# Altium PCB Probe.PcbDoc (part 1 of 2)
Units mm, origin at the board's own origin, x right, y up, seen from the top; angles counter-clockwise.
Board outline 70 x 20 mm, 4 copper layers (Top, IN1 (GND), IN2, Bottom Layer), stack 1.587 mm thick; 69 components, 36 nets, 193 pads, 326 vias.
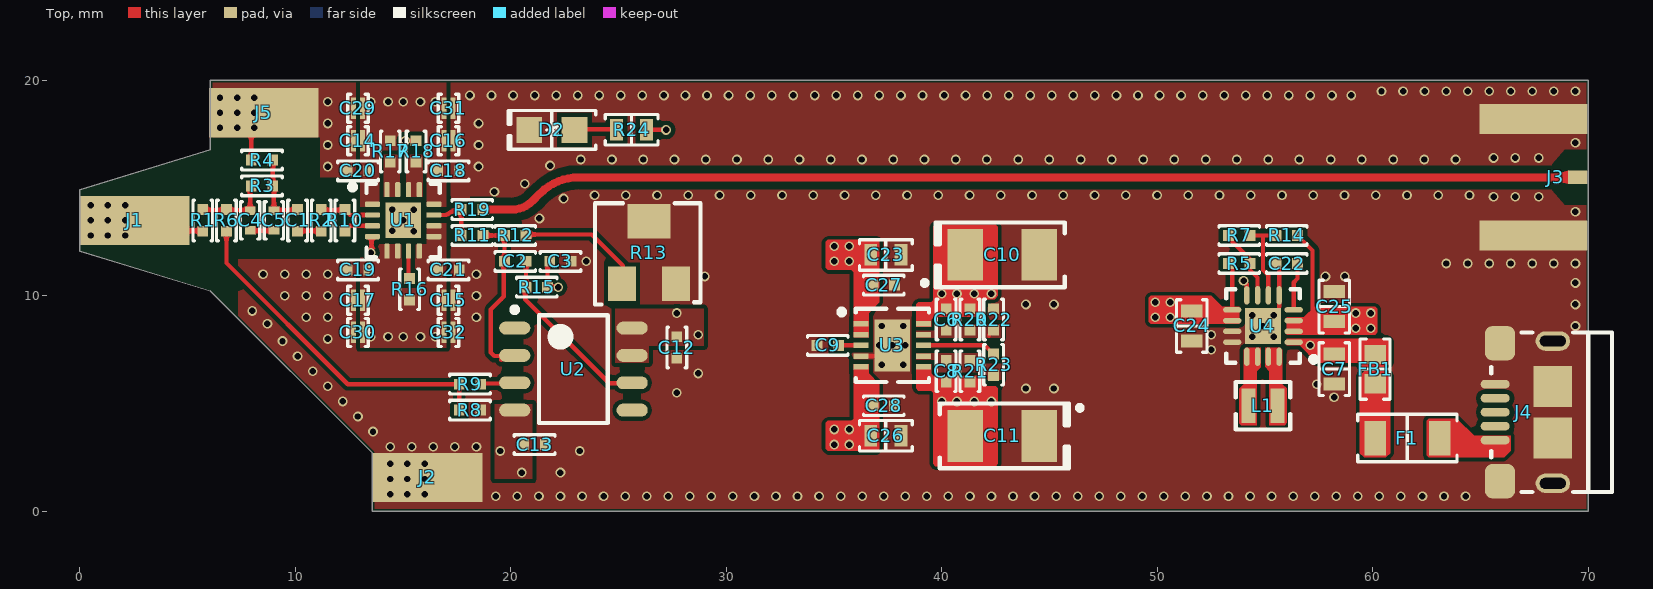
[diagram p0: Top view]
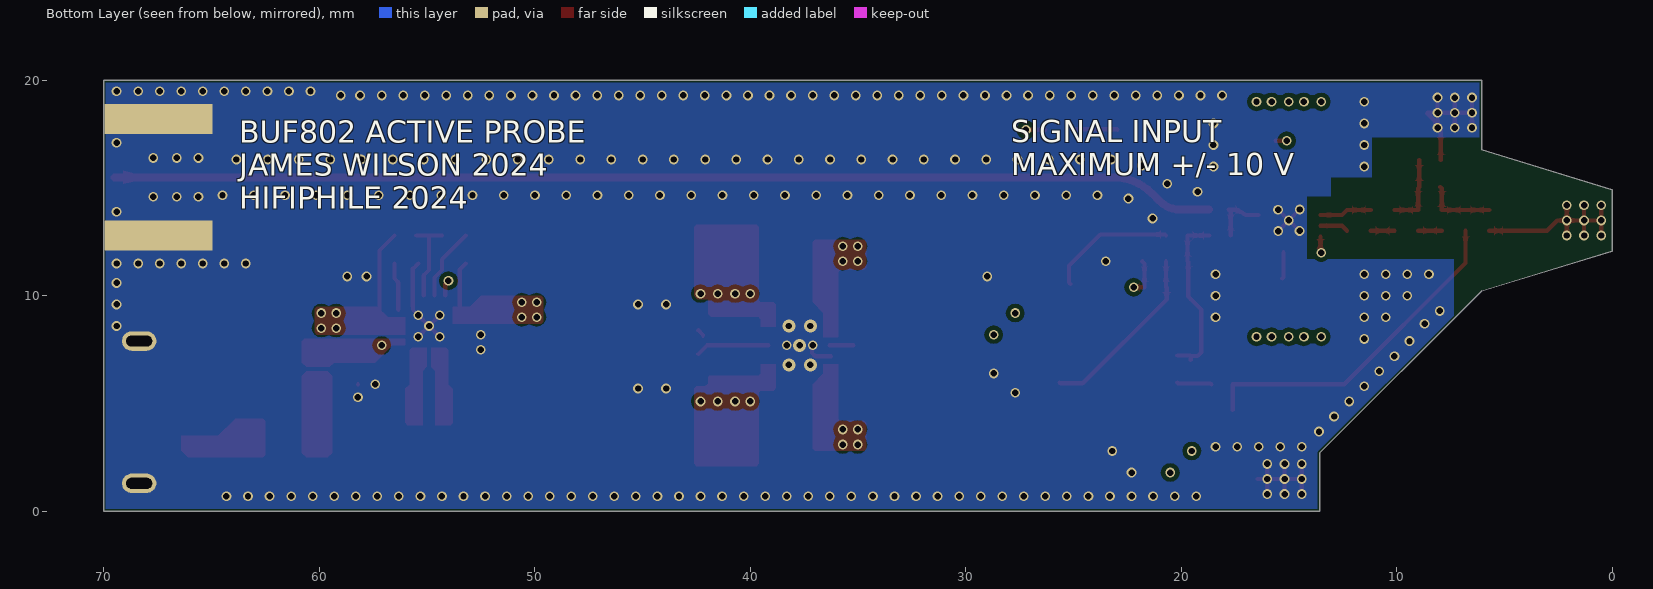
[diagram p1: Bottom Layer view, seen from below]
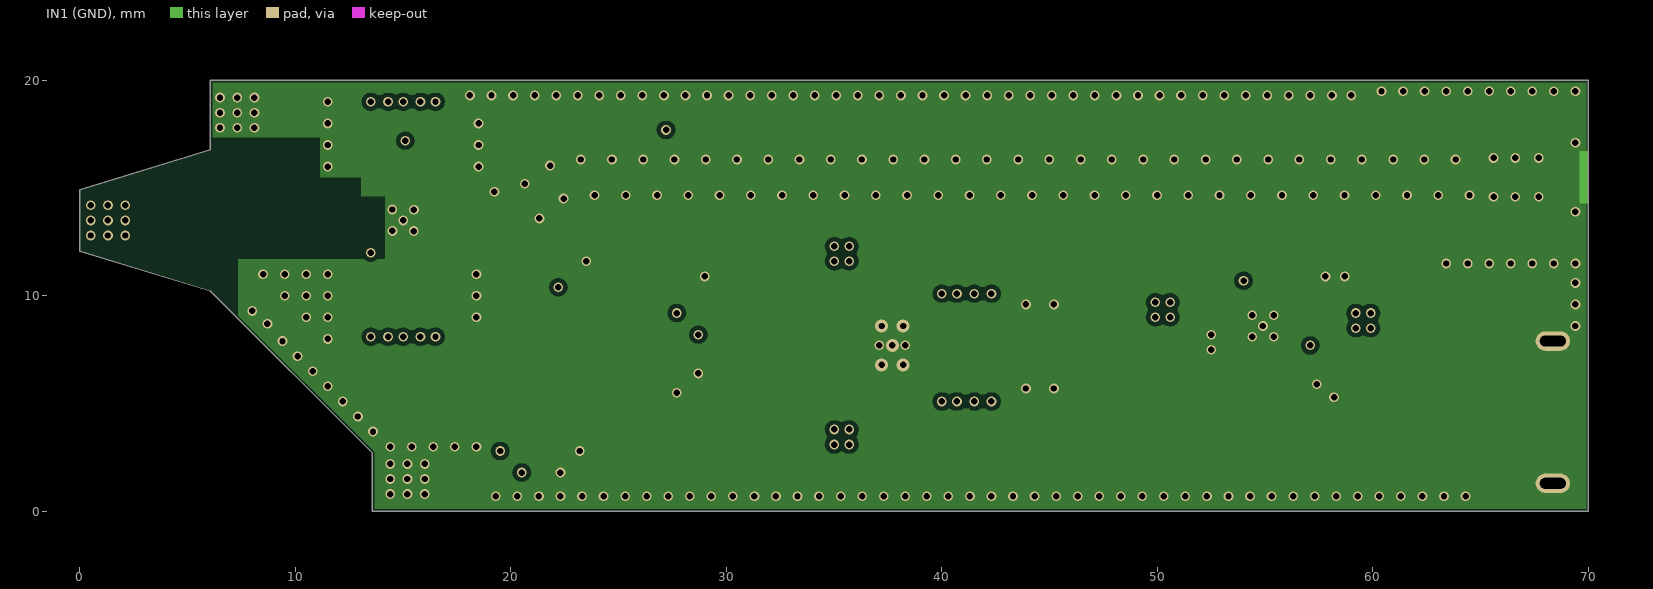
[diagram p2: IN1 (GND)]
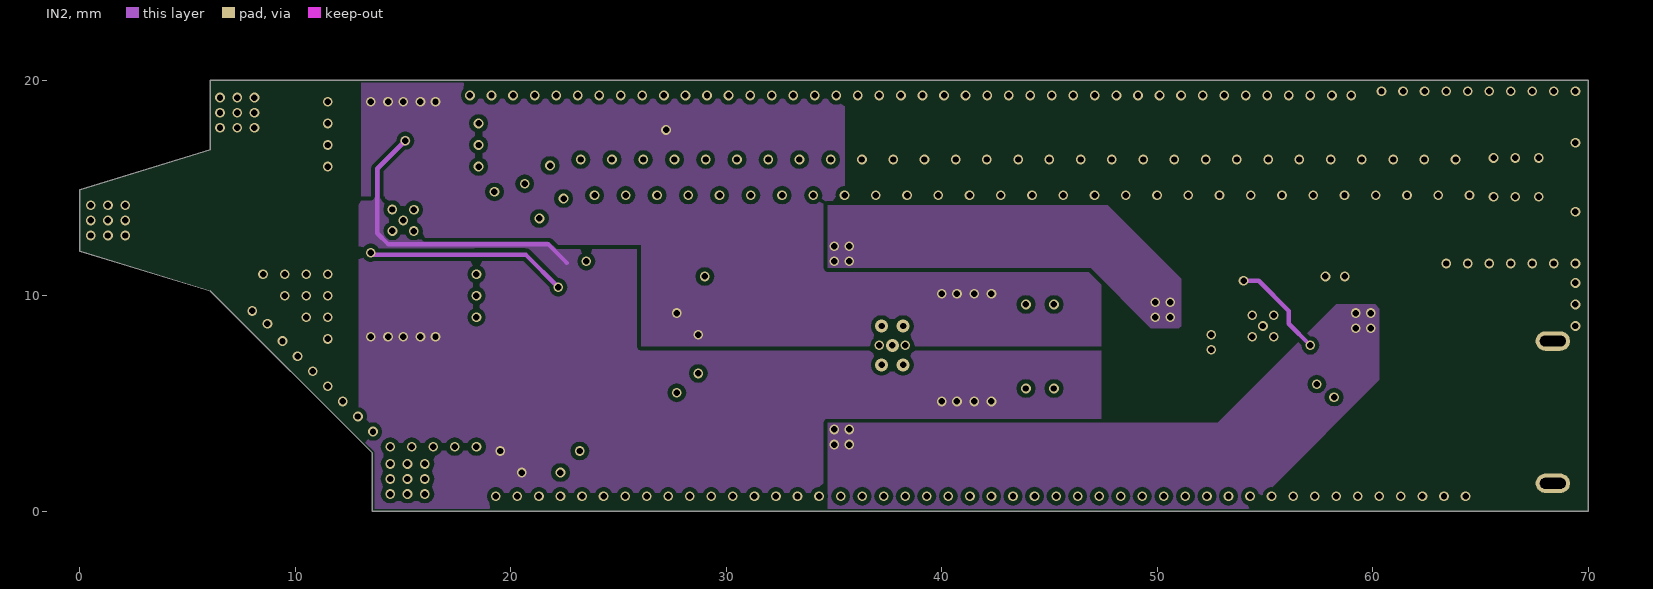
[diagram p3: IN2]

## Layer stack, top to bottom
Top Solder: solder mask 0.0152, Solder Resist, Dk 3.8
Top: signal copper 0.035
Dielectric 1: core 0.2104, FR-4, Dk 4.4
IN1 (GND): signal copper 0.0154
Dielectric 3: core 1.065, Dk 4.43
IN2: signal copper 0.0154
Dielectric 2: core 0.2104, FR-4, Dk 4.4
Bottom Layer: signal copper 0.035
Board Layer Stack Bottom Solder: solder mask 0.0152, Solder Resist, Dk 3.8

## Board outline
0,12.077 0,14.923 6.05,16.775 6.05,20 70,20 70,0 13.575,0 13.575,2.7 6.05,10.225

## Design rules (kind name [scope] priority, off if disabled: settings)
BoardOutlineClearance BoardOutlineClearance_outer [OnCopper and OnOutside] p1: gap=0.1 ignorepadtopadclearanceinfootprint=FALSE
BoardOutlineClearance BoardOutlineClearance_L3 [OnLayer('Signal/Power')] p2: gap=0.3 ignorepadtopadclearanceinfootprint=FALSE
BoardOutlineClearance BoardOutlineClearance_inner [OnCopper and not OnOutside] p3: gap=0.1 ignorepadtopadclearanceinfootprint=FALSE
Clearance Clearance_RF [All vs InNet('OUT')] p1: gap=0.37 ignorepadtopadclearanceinfootprint=FALSE
Clearance [All] p2: gap=0.152 ignorepadtopadclearanceinfootprint=FALSE except(0.199: Arc-Poly Track-Poly SMDPad-Poly THPad-Poly Via-Poly Fill-Poly Poly-Poly; 0.254: Arc-Hole Track-Hole SMDPad-Hole THPad-Hole Via-Hole Fill-Fill Fill-Region Fill-Hole Poly-Hole Region-Hole)
HoleSize [All] p1: absolutevalues=TRUE maxlimit=6.35 minlimit=0.254 maxpercent=80.000 minpercent=20.000
MinimumSolderMaskSliver [All] p1: minsoldermaskwidth=0.102
PlaneClearance [All] p1: clearance=0.3
PlaneConnect [All] p1: planeconnectstyle=Direct reliefexpansion=0.508 reliefentries=4 reliefconductorwidth=0.254 reliefairgap=0.254
PolygonConnect PolygonConnect_Relief [InComponentClass('Power plane relief') vs InNet('GND') OR InNet('VEE') OR InNet('VCC')] p1: connectstyle=Relief reliefconductorwidth=0.254 reliefentries=4 polygonreliefangle="90 Angle" airgapwidth=0.2
PolygonConnect [All] p2: connectstyle=Direct reliefconductorwidth=0.254 reliefentries=4 polygonreliefangle="90 Angle" airgapwidth=0.254
RoutingVias [All] p1: holewidth=0.3 width=0.45 viastyle="Through Hole" minholewidth=0.3 minwidth=0.45 maxholewidth=0.6 maxwidth=1.5
SilkToSolderMaskClearance [IsPad] p1: minsilkscreentomaskgap=0.127 clearancetoexposedcopper=TRUE
SolderMaskExpansion [All] p1: expansion=0.051 istentingtop=FALSE
Width "Schematic Width Constraint" [InNet('OUT')] p1: maxlimit=0.37 minlimit=0.17 preferedwidth=0.37 toplayer_minwidth=0.37 bottomlayer_minwidth=0.37 impedanceprofiledriven=TRUE impedanceprofileid={2937EA07-7A3F-48D3-879A-FAEFCB2B4967} impedanceprofilevalue=50.000000 minimp=50.000000 maximp=50.000000 favimp=50.000000
Width Width_RF [All] p2: maxlimit=5.08 minlimit=0.102 preferedwidth=0.254
Width [All] p3: maxlimit=5.08 minlimit=0.102 preferedwidth=0.254
25 further rules are at their usual default settings.

## Classes and differential pairs
net class Power: GND V+ V- VCC VEE
component class Power: C6 C7 C8 C9 C10 C11 C12 C13 C14 C15 C16 C17 C18 C19 C20 C21 C22 C23 C24 C25 C26 C27 C28 C29 C30 C31 C32 D2 F1 FB1 J4 L1 R5 R7 R14 R20 R21 R22 R23 R24 U3 U4
component class Probe: C1 C2 C3 C4 C5 J1 J2 J3 J5 R1 R2 R3 R4 R6 R8 R9 R10 R11 R12 R13 R15 R16 R17 R18 R19 U1 U2

## Components (designator, comment, footprint, x,y, rotation, side; value= is the part's Value field where it differs from the comment)
C1 "330pF" "CAP 0402/1005" 10.1,13.5 r270 top
C2 "47pF" "CAP 0402/1005" 20.2,11.6 r0 top
C3 "100pF" "CAP 0402/1005" 22.3,11.6 r0 top
C4 "1.1pF" "CAP 0402/1005 RF" 7.9,13.5 r270 top
C5 "1.3pF" "CAP 0402/1005 RF" 9,13.5 r90 top
C6 "10nF" "CAP 0402/1005" 40.2,8.9 r90 top
C7 "10uF" "CAP 0603/1608" 58.2,6.6 r90 top
C8 "10nF" "CAP 0402/1005" 40.2,6.5 r270 top
C9 "10nF" "CAP 0402/1005" 34.7,7.7 r180 top
C10 "22uF" "CAP TAN 3528 - 2.1MM" 42.8,11.9 r0 top
C11 "22uF" "CAP TAN 3528 - 2.1MM" 42.8,3.5 r180 top
C12 "100nF" "CAP 0402/1005" 27.7,7.6 r270 top
C13 "100nF" "CAP 0402/1005" 21.1,3.1 r180 top
C14 "100nF" "CAP 0204/0510" 12.9,17.2 r180 top
C15 "100nF" "CAP 0204/0510" 17.1,9.8 r180 top
C16 "100nF" "CAP 0204/0510" 17.1,17.2 r0 top
C17 "100nF" "CAP 0204/0510" 12.9,9.8 r0 top
C18 "10nF" "CAP 0402/1005" 17.1,15.8 r0 top
C19 "10nF" "CAP 0402/1005" 12.9,11.2 r0 top
C20 "10nF" "CAP 0402/1005" 12.9,15.8 r180 top
C21 "10nF" "CAP 0402/1005" 17.1,11.2 r180 top
C22 "100nF" "CAP 0402/1005" 56,11.5 r180 top
C23 "10uF" "CAP 0603/1608" 37.4,11.9 r0 top
C24 "10uF" "CAP 0603/1608" 51.6,8.6 r270 top
C25 "10uF" "CAP 0603/1608" 58.2,9.5 r90 top
C26 "10uF" "CAP 0603/1608" 37.4,3.5 r180 top
C27 "100nF" "CAP 0402/1005" 37.3,10.5 r0 top
C28 "100nF" "CAP 0402/1005" 37.3,4.9 r180 top
C29 "100nF" "CAP 0204/0510" 12.9,18.7 r180 top
C30 "100nF" "CAP 0204/0510" 12.9,8.3 r0 top
C31 "100nF" "CAP 0204/0510" 17.1,18.7 r0 top
C32 "100nF" "CAP 0204/0510" 17.1,8.3 r180 top
D2 "Green" "LED 0805/2012 GREEN" 21.9,17.7 r180 top
F1 "500mA" "PPTC 1206/3216" 61.6,3.4 r180 top
FB1 "470 Ohms @ 100MHz" "FER 0603/1608" 60.1,6.6 r90 top
J1 "0339-0-15-01-15-27-10-0" "MILL-MAX 0339"#1 0,13.5 r0 top
J2 "0339-0-15-01-15-27-10-0" "MILL-MAX 0339"#2 13.6,1.5 r0 top
J3 "CONN SMA JACK EDGE MNT" 60312202114513 75.5,15.5 r90 top
J4 "Micro USB" "FCI USB 10118193-0001LF" 68.3,4.6 r270 top
J5 "0339-0-15-01-15-27-10-0" "MILL-MAX 0339"#1 6,18.5 r0 top
L1 "2.2uH" "TDK VLS201612CX" 54.9,4.9 r180 top
R1 "100" "RES 0402/1005" 5.7,13.5 r90 top
R2 "0" "RES 0402/1005" 11.2,13.5 r90 top
R3 "1.6M" "RES 0402/1005" 8.45,15.1 r0 top
R4 "422K" "RES 0402/1005" 8.45,16.3 r180 top
R5 "453K" "RES 0402/1005" 53.8,11.5 r180 top
R6 "1.91M" "RES 0402/1005" 6.8,13.5 r270 top
R7 "120K" "RES 0402/1005" 53.8,12.8 r180 top
R8 "66.5k" "RES 0402/1005" 18.1,4.7 r0 top value=66.5K
R9 "68" "RES 0402/1005" 18.1,5.9 r0 top
R10 "10M" "RES 0402/1005" 12.3,13.5 r270 top
R11 "51K" "RES 0402/1005" 18.2,12.8 r180 top
R12 "10K" "RES 0402/1005" 20.2,12.8 r0 top
R13 "1k" "BOURNS 3224W" 26.4,12 r270 top value=1K
R14 "576K" "RES 0402/1005" 56,12.8 r180 top
R15 "5.6K" "RES 0402/1005" 21.2,10.4 r180 top
R16 "17.8k" "RES 0402/1005" 15.3,10.3 r270 top value=17.8K
R17 "1K" "RES 0402/1005" 14.4,16.7 r90 top
R18 "1K" "RES 0402/1005" 15.6,16.7 r90 top
R19 "49.9" "RES 0402/1005" 18.2,14 r0 top
R20 "36.5K" "RES 0402/1005" 41.3,8.9 r270 top
R21 "46.4K" "RES 0402/1005" 41.3,6.5 r270 top
R22 "10K" "RES 0402/1005" 42.4,8.9 r90 top
R23 "10K" "RES 0402/1005" 42.4,6.8 r90 top
R24 "10K" "RES 0603/1608" 25.6,17.7 r180 top
U1 "BUF802IRGTR" QFN50P305X305X100_HS-17N#1 15,13.5 r0 top
U2 "OPA140AIDR" "TI SOIC-8 D" 22.9,6.6 r0 top
U3 "TPS7A3901DCST" DFN50P300X300X80_HS-11N 37.7,7.7 r0 top
U4 "TPS65135RTER" QFN50P305X305X100_HS-17N#2 54.9,8.6 r180 top

## Footprints (in the part's own frame and the unit in brackets; to place one, negate y for a bottom-side part, rotate by r counter-clockwise, add the part's x,y. Pads: shape width x height; smd on the part's side, far side on the other; paste and mask are expansions set on the pad)
60312202114513 [mm] "SMA PCB End Launch Jack Flat Tab  6.35SQ Flange for 1.6mm PCB"
  rect 0.61x0.9 smd: 1(0,6)
  rect 1.4x5 smd: 2(-2.7,8.05) 2(2.7,8.05)
  rect 1.4x5 smd far side: 2(-2.7,8.05) 2(2.7,8.05)
  body extent -3.17,-3.95 3.17,10.25, height 3.34
"BOURNS 3224W" [mm] "3224 - 4 mm SMD Trimpot Trimming Potentiometer"
  rect 1.6x1.3 smd paste+0 mask+0: 1(1.45,-1.25) 3(1.45,1.25)
  rect 1.6x2 smd paste+0 mask+0: 2(-1.45,0)
  silkscreen extent -2.3,-2.5 2.4,2.4, body extent -1.98,-2.41 1.98,2.41, height 5.29
"CAP 0204/0510" [mm] "Chip Capacitor, 2-Leads, Body 0.52x1.0mm, IPC Medium Density"
  rect 0.22x1 smd paste+0 mask+0.02: 1(-0.21,0) 2(0.21,0)
  silkscreen extent -0.47,-0.65 0.47,0.65, body extent -0.26,-0.5 0.26,0.5, height 0.35
"CAP 0402/1005" [mm] "Chip Capacitor, 2-Leads, Body 1.02x0.51mm, IPC Medium Density"
  rect 0.5x0.5 smd: 1(-0.5,0) 2(0.5,0)
  silkscreen extent -0.94,-0.46 0.94,0.46, body extent -0.5,-0.26 0.5,0.26, height 0.52
"CAP 0402/1005 RF" [mm] "Chip Capacitor, 2-Leads, Body 1.02x0.51mm, IPC High Density"
  rect 0.4x0.5 smd: 1(-0.45,0) 2(0.45,0)
  silkscreen extent -0.87,-0.45 0.86,0.45, body extent -0.5,-0.26 0.5,0.26, height 0.52
"CAP 0603/1608" [mm] "Chip Capacitor, 2-Leads, Body 1.60x0.80mm, IPC Medium Density"
  rect 0.6x1 smd: 1(-0.7,0) 2(0.7,0)
  silkscreen extent -1.22,-0.71 1.22,0.7, body extent -0.8,-0.41 0.8,0.41, height 0.82
"CAP TAN 3528 - 2.1MM" [mm] "Molded Capacitor, 2-Leads, Body 3.50x2.80mm, IPC Medium Density"
  rect 1.65x2.4 smd: 1(-1.725,0) 2(1.725,0)
  silkscreen extent -3.7,-1.5 2.9,1.5, body extent -1.75,-1.4 1.75,1.4, height 1.91
DFN50P300X300X80_HS-11N [mm] "DFN, 10-Leads, Body 3.00x3.00mm, Pitch 0.50mm, Thermal Pad 1.65x2.40mm, IPC Medium Density"
  rect 0.7x0.25 smd: 1(-1.45,1) 2(-1.45,0.5) 3(-1.45,0) 4(-1.45,-0.5) 5(-1.45,-1) 6(1.45,-1) 7(1.45,-0.5) 8(1.45,0) 9(1.45,0.5) 10(1.45,1)
  rect 1.65x2.4 smd paste-2: 11(0,0)
  silkscreen extent -2.47,-1.7 1.7,1.7, body extent -1.6,-1.55 1.6,1.55, height 0.8
"FCI USB 10118193-0001LF" [mm] "USB 2.0 Type B Micro"
  oval 0.4x1.35 smd: 1(1.3,-2.625) 2(0.65,-2.625) 3(0,-2.625) 4(-0.65,-2.625) 5(-1.3,-2.625)
  oval 0.9x1.6 hole 0.5 slot 1.2 at 90 deg: S(-3.3,0.05) S(3.3,0.05)
  rrect50% 1.6x1.4 smd: S(-3.2,-2.4) S(3.2,-2.4)
  rect 1.9x1.8 smd: S(-1.2,0.05) S(1.2,0.05)
  silkscreen extent -3.7,-2.8 3.7,2.8, body extent -3.93,-2.9 3.93,2.76, height 2.78
"FER 0603/1608" [mm] "Chip Ferrite, 2-Leads, Body 1.60x0.80mm, IPC Medium Density"
  rect 0.9x1 smd: 1(-0.675,0) 2(0.675,0)
  silkscreen extent -1.4,-0.7 1.4,0.7, body extent -0.8,-0.41 0.8,0.41, height 0.82
"LED 0805/2012 GREEN" [mm] "Chip Diode, 2-Leads, Body 2.00x1.25mm, IPC Medium Density"
  rect 1.2x1.2 smd: 1(-1.05,0) 2(1.05,0)
  silkscreen extent -2.03,-0.9 2.03,0.9, body extent -1,-0.62 1,0.63, height 0.9
"MILL-MAX 0339"#1 [mil] "MILL-MAX 0339"
  rect 200x90 smd paste-1000: 1(100,0)
  body extent -15,-34 175,34, height 61
"MILL-MAX 0339"#2 [mil] "MILL-MAX 0339"
  rect 200x90 smd paste-1000: 1(100,2.91)
  body extent -15,-34 175,34, height 61
"PPTC 1206/3216" [mm] "PPTC 2-Leads, Body 3.2x1.6mm, IPC Medium Density"
  rect 1x1.6 smd: 1(-1.5,0) 2(1.5,0)
  silkscreen extent -2.3,-1.1 2.3,1.1, body extent -1.6,-0.83 1.6,0.83, height 0.56
QFN50P305X305X100_HS-17N#1 [mm] "QFN, 16-Leads, Body 3.05x3.05mm, Pitch 0.50mm, Thermal Pad 1.65x1.65mm, IPC Medium Density"
  rrect50% 0.7x0.25 smd: 1(-1.425,0.75) 2(-1.425,0.25) 3(-1.425,-0.25) 4(-1.425,-0.75) 9(1.425,-0.75) 10(1.425,-0.25) 11(1.425,0.25) 12(1.425,0.75)
  rrect50% 0.25x0.7 smd: 5(-0.75,-1.425) 6(-0.25,-1.425) 7(0.25,-1.425) 8(0.75,-1.425) 13(0.75,1.425) 14(0.25,1.425) 15(-0.25,1.425) 16(-0.75,1.425)
  rect 1.65x1.65 smd paste-0.1: 17(0,0)
  silkscreen extent -2.47,-1.7 1.7,1.7, body extent -1.56,-1.56 1.56,1.56, height 1
QFN50P305X305X100_HS-17N#2 [mm] "QFN, 16-Leads, Body 3.05x3.05mm, Pitch 0.50mm, Thermal Pad 1.65x1.65mm, IPC Medium Density"
  oval 0.85x0.25 smd: 1(-1.425,0.75) 2(-1.425,0.25) 3(-1.425,-0.25) 4(-1.425,-0.75) 9(1.425,-0.75) 10(1.425,-0.25) 11(1.425,0.25) 12(1.425,0.75)
  oval 0.25x0.85 smd: 5(-0.75,-1.425) 6(-0.25,-1.425) 7(0.25,-1.425) 8(0.75,-1.425) 13(0.75,1.425) 14(0.25,1.425) 15(-0.25,1.425) 16(-0.75,1.425)
  rect 1.65x1.65 smd paste-0.1: 17(0,0)
  silkscreen extent -2.48,-1.7 1.7,1.7, body extent -1.56,-1.56 1.56,1.56, height 1
"RES 0402/1005" [mm] "Chip Resistor, 2-Leads, Body 1.0x0.5mm, IPC Medium Density"
  rect 0.5x0.5 smd: 1(-0.5,0) 2(0.5,0)
  silkscreen extent -0.94,-0.46 0.94,0.46, body extent -0.5,-0.25 0.5,0.25, height 0.35
"RES 0603/1608" [mm] "Chip Resistor, 2-Leads, Body 1.60x0.80mm, IPC Medium Density"
  rect 0.6x1 smd: 1(-0.7,0) 2(0.7,0)
  silkscreen extent -1.22,-0.71 1.22,0.7, body extent -0.8,-0.4 0.8,0.4, height 0.45
"TDK VLS201612CX" [mm] "Inductor, 2-Leads, Body 2.00x1.60mm, IPC Medium Density"
  rect 0.65x1.6 smd: 1(-0.675,0) 2(0.675,0)
  silkscreen extent -1.27,-1.1 1.27,1.1, body extent -1,-0.8 1,0.8, height 1.2
"TI SOIC-8 D" [mm] "SOIC, 8-Leads, Body 4.90x3.90mm, Pitch 1.27mm, IPC Medium Density"
  oval 1.45x0.6 smd: 1(-2.725,1.905) 2(-2.725,0.635) 3(-2.725,-0.635) 4(-2.725,-1.905) 5(2.725,-1.905) 6(2.725,-0.635) 7(2.725,0.635) 8(2.725,1.905)
  silkscreen extent -2.85,-2.5 1.6,2.88, body extent -3,-2.5 3,2.5, height 1.75

## Part data
C1: library part CM0293, "CAP CER 330PF 50V NP0 0402", Device Package="0402 (1005 Metric)", Manufacturer=Murata, Part Number=GRM1555C1H331JA01D, Supplier Part Number 1=490-1295-2-ND, TemperatureCoefficient="C0G, NP0", TemperatureRange="-55C ~ 125C", Tolerance=5%, Voltage=50V, ComponentLink1Description=Datasheet, ComponentLink1URL=http://www.murata.com/~/media/webrenewal/support/library/catalog/products/capacitor/mlcc/c02e.ashx, ComponentLink2Description="Digi-Key listing", ComponentLink2URL=http://digikey.com/product-detail/en/GRM1555C1H331JA01D/490-1295-2-ND/587206, PartId=CM0293, Price=0.009, Supplier 1=Digi-Key, Type=-
C2: library part CM0224, "CAP CER 47PF 50V NP0 0402", Device Package="0402 (1005 Metric)", Manufacturer=Murata, Part Number=GRM1555C1H470FA01D, Supplier Part Number 1=490-6241-2-ND, TemperatureCoefficient="C0G, NP0", TemperatureRange="-55C ~ 125C", Tolerance=1%, Voltage=50V, ComponentLink1Description=Datasheet, ComponentLink1URL=http://www.murata.com/~/media/webrenewal/support/library/catalog/products/capacitor/mlcc/c02e.ashx, ComponentLink2Description="Digi-Key listing", ComponentLink2URL=http://digikey.com/product-detail/en/GRM1555C1H470FA01D/490-6241-2-ND/3693991, PartId=CM0224, Price=0.0133, Supplier 1=Digi-Key, Type=-
C3: library part CM0248, "CAP CER 100PF 50V NP0 0402", Device Package="0402 (1005 Metric)", Manufacturer=Murata, Part Number=GRM1555C1H101FA01D, Supplier Part Number 1=490-8180-2-ND, TemperatureCoefficient="C0G, NP0", TemperatureRange="-55C ~ 125C", Tolerance=1%, Voltage=50V, ComponentLink1Description=Datasheet, ComponentLink1URL=http://www.murata.com/~/media/webrenewal/support/library/catalog/products/capacitor/mlcc/c02e.pdf, ComponentLink2Description="Digi-Key Listing", ComponentLink2URL=https://www.digikey.com/product-detail/en/murata-electronics-north-america/GRM1555C1H101FA01D/490-8180-2-ND/3693919, PartId=CM0248, Price=0.0092, Supplier 1=Digi-Key
C4: library part CR1657, "CAP CER 1.1PF +-0.05PF 50V NP0 0201", Device Package="0402 (1005 Metric)", Manufacturer=Murata, Part Number=GJM1555C1H1R1WB01D, Supplier Part Number 1=81-GJM1555C1H1R1WB01D, TemperatureCoefficient="C0G, NP0", TemperatureRange="-55C ~ 125C", Tolerance=0.05pF, Voltage=50V, ComponentLink1Description=Datasheet, ComponentLink1URL=https://www.murata.com/en-eu/products/capacitor/ceramiccapacitor/overview/lineup/smd/gjm, PartId=CR1657, Price=0.02, Supplier 1=Mouser, Type="High Q, Low Loss"
C5: library part CR1663, "CAP CER 1.3PF +-0.05PF 50V NP0 0201", Device Package="0402 (1005 Metric)", Manufacturer=Murata, Part Number=GJM1555C1H1R3WB01D, Supplier Part Number 1=81-GJM1555C1H1R3WB01D, TemperatureCoefficient="C0G, NP0", TemperatureRange="-55C ~ 125C", Tolerance=0.05pF, Voltage=50V, ComponentLink1Description=Datasheet, ComponentLink1URL=https://www.murata.com/en-eu/products/capacitor/ceramiccapacitor/overview/lineup/smd/gjm, PartId=CR1663, Price=0.02, Supplier 1=Mouser, Type="High Q, Low Loss"
C6 C8 C9 C18 C19 C20 C21: library part CM2150, "CAP CER 10NF 25V NP0 0402", Device Package="0402 (1005 Metric)", Manufacturer=Murata, Part Number=GRM1555C1E103GE01D, Supplier Part Number 1=81-GRM1555C1E103GE1D, TemperatureCoefficient="C0G, NP0", TemperatureRange="-55C ~ 125C", Tolerance=2%, Voltage=25V, ComponentLink1Description=Datasheet, ComponentLink1URL=https://www.murata.com/en-global/products/productdetail?partno=GRM1555C1E103GE01%23, PartId=CM2150, Price=0.1, Supplier 1=Mouser, Supplier 2=Digi-Key, Supplier Part Number 2=490-GRM1555C1E103GE01DTR-ND
C7 C23 C26: library part CM0904, "CAP CER 10UF 16V X5R 0603", Device Package="0603 (1608 Metric)", Manufacturer="Murata Electronics North America", Part Number=GRM188R61C106MA73D, Supplier Part Number 1=490-7201-2-ND, TemperatureCoefficient=X5R, TemperatureRange="-55C ~ 85C", Tolerance=20%, Voltage=16V, ComponentLink1Description=Datasheet, ComponentLink1URL=http://www.murata.com/~/media/webrenewal/support/library/catalog/products/capacitor/mlcc/c02e.pdf, ComponentLink2Description="Digi-Key Listing", ComponentLink2URL=https://www.digikey.com/product-detail/en/murata-electronics-north-america/GRM188R61C106MA73D/490-7201-2-ND/3900480, PartId=CM0904, Price=0.0736, Supplier 1=Digi-Key
C10 C11: library part CAT304, "CAP TANT 22UF 16V 3528", Device Package="3528 x 2.1mm (Case B)", Lifetime @ Temp="1000 Hrs @ 85C", Manufacturer=AVX, Part Number=293D226X0016B2TE3, Ripple Current=0.21A, Supplier Part Number 1=74-293D226X0016B2TE3, TemperatureRange="-55C ~ 125C", Tolerance=20%, Voltage=16V, ComponentLink1Description=Datasheet, ComponentLink1URL=https://www.vishay.com/docs/40002/293d.pdf, Height=2.1mm, Impedance="1.9Ohm @ 100kHz", PartId=CAT304, Series=293D, Supplier 1=Mouser
C12 C13 C22: library part CM0464, "CAP CER 100NF 25V X5R 0402", Device Package="0402 (1005 Metric)", Manufacturer=Murata, Part Number=GRM155R61E104KA87D, Supplier Part Number 1=490-5920-2-ND, TemperatureCoefficient=X5R, TemperatureRange="-55C ~ 85C", Tolerance=10%, Voltage=25V, ComponentLink1Description=Datasheet, ComponentLink1URL=http://www.murata.com/~/media/webrenewal/support/library/catalog/products/capacitor/mlcc/c02e.pdf, ComponentLink2Description="Digi-Key Listing", ComponentLink2URL=https://www.digikey.com/product-detail/en/murata-electronics-north-america/GRM155R61E104KA87D/490-5920-2-ND/3693681, PartId=CM0464, Price=0.0048, Supplier 1=Digi-Key
C14 C15 C16 C17 C29 C30 C31 C32: library part CLW004, "CAP CER 100NF 25V X5R 0204", Device Package="0204 (0510 Metric)", Manufacturer="Taiyo Yuden", Part Number=MSRLT103SB5104MFNA01, Supplier Part Number 1=963-MSRLT103SB5104MFNA01, TemperatureCoefficient=X5R, TemperatureRange="-55C ~ 85C", Tolerance=20%, Voltage=25V, ComponentLink1Description=Datasheet, ComponentLink1URL=https://ds.yuden.co.jp/TYCOMPAS/or/detail?pn=MSRLT103SB5104MFNA01, PartId=CLW004, Price=0.02, Supplier 1=Mouser, Type="Reversal Decoupling Low ESL"
C24 C25: library part CM0904, "CAP CER 10UF 16V X5R 0603", Device Package="0603 (1608 Metric)", Manufacturer=Murata, Part Number=GRM188R61C106MA73D, Supplier Part Number 1=490-7201-2-ND, TemperatureCoefficient=X5R, TemperatureRange="-55C ~ 85C", Tolerance=20%, Voltage=16V, ComponentLink1Description=Datasheet, ComponentLink1URL=http://www.murata.com/~/media/webrenewal/support/library/catalog/products/capacitor/mlcc/c02e.pdf, ComponentLink2Description="Digi-Key Listing", ComponentLink2URL=https://www.digikey.com/product-detail/en/murata-electronics-north-america/GRM188R61C106MA73D/490-7201-2-ND/3900480, PartId=CM0904, Price=0.0736, Supplier 1=Digi-Key
C27 C28: library part CM0464, "CAP CER 100NF 25V X5R 0402", Device Package="0402 (1005 Metric)", Manufacturer="Murata Electronics North America", Part Number=GRM155R61E104KA87D, Supplier Part Number 1=490-5920-2-ND, TemperatureCoefficient=X5R, TemperatureRange="-55C ~ 85C", Tolerance=10%, Voltage=25V, ComponentLink1Description=Datasheet, ComponentLink1URL=http://www.murata.com/~/media/webrenewal/support/library/catalog/products/capacitor/mlcc/c02e.pdf, ComponentLink2Description="Digi-Key Listing", ComponentLink2URL=https://www.digikey.com/product-detail/en/murata-electronics-north-america/GRM155R61E104KA87D/490-5920-2-ND/3693681, PartId=CM0464, Price=0.0048, Supplier 1=Digi-Key
D2: library part LS0073, "LED GREEN CLEAR 0805 SMD", Current (Test)=20mA, Device Package="0805 (2012 Metric)", Manufacturer="Lite-On Inc.", Part Number=LTST-C171KGKT, Supplier Part Number 1=160-1426-2-ND, Voltage Forward=2V, Colour=Green, ComponentLink1Description=Datasheet, ComponentLink1URL=http://optoelectronics.liteon.com/upload/download/DS22-2000-118/LTST-C171KGKT.pdf, ComponentLink2Description="Digi-Key Listing", ComponentLink2URL=http://www.digikey.ca/product-detail/en/LTST-C171KGKT/160-1426-2-ND/386799, Lens Transparency=Clear, Millicandela=35mcd, PartId=LS0073, Price=0.0638, Supplier 1=Digi-Key, Type="Surface Mount", Viewing Angle=130
F1: library part FP0006, "PTC RESET FUSE 13.2V 500MA 1206", Current - Max=100A, Current - Trip (It)=1.1A, Device Package="1206 (3216 Metric), Concave", Manufacturer=Littelfuse, Part Number=NANOSMDC050F/13.2-2, Resistance - Initial (Ri) (Min)="200 mOhms", Resistance - Post Trip (R1) (Max)="750 mOhms", Supplier Part Number 1=650-NANOSMDC050F/13.2-2, TemperatureRange="-45C ~ 85C", Voltage - Max=13.2V, ComponentLink1Description=Datasheet, ComponentLink1URL=https://www.littelfuse.com/~/media/electronics/datasheets/resettable_ptcs/littelfuse_ptc_nanosmdc_datasheet.pdf.pdf, Current - Hold (Ih) (Max)=500mA, PartId=FP0006, Price=0.48, Supplier 1=Mouser, Supplier 2=Digikey, Supplier Part Number 2=NANOSMDC050F/13.2-2CT-ND, Time to Trip=100ms, Type=PPTC
FB1: library part FTP046, "FERRITE BEAD 470 OHM 0603 1LN", Current Rating=1A, DC Resistance="150 mOhm", Device Package="0603 (1608 Metric)", Manufacturer=TDK, Part Number=MPZ1608B471ATA00, Supplier Part Number 1=445-5218-1-ND, ComponentLink1Description=Datasheet, ComponentLink1URL=https://product.tdk.com/info/en/catalog/datasheets/beads_commercial_power_mpz1608_en.pdf, PartId=FTP046, Price=0.1, Supplier 1=Digi-Key
J1 J2 J5: "CONN PIN RCPT", Manufacturer=Mill-Max, Max Operating Temperature=125°C, Min Operating Temperature=-55°C, Supplier Part Number 1=0339-0-15-01-15-27-10-0-ND, ComponentLink1Description=https://www.mill-max.com/assets/pdfs/172.pdf?src-supplier=Digi-Key, ComponentLink1URL=https://www.mill-max.com/assets/pdfs/172.pdf?src-supplier=Digi-Key, ComponentLink2Description=https://datasheet.octopart.com/0339-0-15-01-15-27-10-0-Mill-Max-datasheet-26446830.pdf?src-supplier=Future+Electronics, ComponentLink2URL=https://datasheet.octopart.com/0339-0-15-01-15-27-10-0-Mill-Max-datasheet-26446830.pdf?src-supplier=Future+Electronics, ComponentLink3Description=http://www.mouser.com/ds/2/273/172M-276194.pdf?src-supplier=Mouser, ComponentLink3URL=http://www.mouser.com/ds/2/273/172M-276194.pdf?src-supplier=Mouser, ComponentLink4Description=https://datasheet.octopart.com/0339-0-15-01-15-27-10-0-Mill-Max-datasheet-155663258.pdf?src-supplier=Sager+Electronics, ComponentLink4URL=https://datasheet.octopart.com/0339-0-15-01-15-27-10-0-Mill-Max-datasheet-155663258.pdf?src-supplier=Sager+Electronics, Contact Material=Copper, Contact Plating=Gold, Packaging=Bulk, Part Number=0339-0-15-01-15-27-10-0, Pricing 1="1=1.42, 10=1.234, 25=1.1812, 50=1.155, 100=1.1025, 250=0.99748, 500=0.91874, 1000=0.7875, 2500=0.735 (USD)", RoHS Compliant=No, Series=0339, Stock 1=989, Supplier 1=Digi-Key, Supplier 2=Mouser, Supplier Part Number 2=575-0339015011527100, Termination=Solder
J3: library part CRF016, "WR-SMA Connector, PCB End Launch Jack, 6.35SQ Flange Flat Tab 1.6mm, DC~18GHz, 50Ohm", Manufacturer=Wurth, Operating Temperature="-65C ~ 165C", Part Number=60312202114513, Supplier Part Number 1=710-60312202114513, ComponentLink1Description=Datasheet, ComponentLink1URL=https://www.we-online.com/redexpert/spec/603122021, Connector Type="SMA Jack", Impedance=50Ohm, Mounting Technology="End Launch", Orientation=Straight, PartId=CRF016, Supplier 1=Mouser, Supplier 2=Digi-Key, Supplier Part Number 2=732-13844-ND
J4: library part CU0001, "CONN USB MICRO B RECPT SMT R/A", Manufacturer=FCI, Part Number=10118193-0001LF, Supplier Part Number 1=609-4616-2-ND, ComponentLink1Description=Datasheet, ComponentLink1URL=http://portal.fciconnect.com/Comergent//fci/drawing/10118193.pdf, ComponentLink2Description="Digi-Key Listing", ComponentLink2URL=http://www.digikey.ca/product-detail/en/10118193-0001LF/609-4616-2-ND/2785388, Number Of Positions=5, PartId=CU0001, Supplier 1=Digi-Key, Type="USB - micro B"
L1: library part ITV008, "FIXED IND 2.2UH 1.5A 140 MOHM", Current - Saturation=1.33A, Current Rating=1.5A, DC Resistance (DCR)="140 mOhm Max", Device Package="0806 (2016 Metric)", Manufacturer=TDK, Part Number=VLS201612CX-2R2M-1, Supplier Part Number 1=445-172963-1-ND, Tolerance=20%, ComponentLink1Description=Datasheet, ComponentLink1URL=https://product.tdk.com/info/en/catalog/datasheets/inductor_commercial_power_vls201612cx-1_en.pdf, Operating Temperature="140 mOhm Max", PartId=ITV008, Supplier 1=Digi-Key
R1: library part RC1250, "RES SMD 100 OHM 1% 1/16W 0402", Device Package="0402 (1005 Metric)", Manufacturer=Yageo, Part Number=RC0402FR-07100RL, PowerRating="0.0625W, 1/16W", Supplier Part Number 1=603-RC0402FR-07100RL, TemperatureCoefficient=100ppm/C, TemperatureRange="-55C ~ 155C", Tolerance=1%, ComponentLink1Description=Datasheet, ComponentLink1URL=http://www.yageo.com/NewPortal/yageodocoutput?fileName=/pdf/R-Chip/PYu-RC_Group_51_RoHS_L_9.pdf, PartId=RC1250, Price=0.0043, Supplier 1=Mouser, Type="Thick Film"
R2: library part RC0971, "RES SMD 0 OHM 5% 1/16W 0402", Device Package="0402 (1005 Metric)", Manufacturer=Yageo, Part Number=RC0402JR-070RL, PowerRating="0.0625W, 1/16W", Supplier Part Number 1=603-RC0402JR-070RL, TemperatureCoefficient=100ppm/C, TemperatureRange="-55C ~ 155C", Tolerance=5%, ComponentLink1Description=Datasheet, ComponentLink1URL=http://www.yageo.com/NewPortal/yageodocoutput?fileName=/pdf/R-Chip/PYu-RC_Group_51_RoHS_L_9.pdf, PartId=RC0971, Price=0.0043, Supplier 1=Mouser, Type="Thick Film"
R3: library part RC1837, "RES SMD 1.6M OHM 1% 1/16W 0402", Device Package="0402 (1005 Metric)", Manufacturer=Yageo, Part Number=RC0402FR-071M6L, PowerRating="0.0625W, 1/16W", Supplier Part Number 1=603-RC0402FR-071M6L, TemperatureCoefficient=100ppm/C, TemperatureRange="-55C ~ 155C", Tolerance=1%, ComponentLink1Description=Datasheet, ComponentLink1URL=http://www.yageo.com/NewPortal/yageodocoutput?fileName=/pdf/R-Chip/PYu-RC_Group_51_RoHS_L_9.pdf, PartId=RC1837, Price=0.0043, Supplier 1=Mouser, Type="Thick Film"
R4: library part RC1757, "RES SMD 422K OHM 1% 1/16W 0402", Device Package="0402 (1005 Metric)", Manufacturer=Yageo, Part Number=RC0402FR-07422KL, PowerRating="0.0625W, 1/16W", Supplier Part Number 1=603-RC0402FR-07422KL, TemperatureCoefficient=100ppm/C, TemperatureRange="-55C ~ 155C", Tolerance=1%, ComponentLink1Description=Datasheet, ComponentLink1URL=http://www.yageo.com/NewPortal/yageodocoutput?fileName=/pdf/R-Chip/PYu-RC_Group_51_RoHS_L_9.pdf, PartId=RC1757, Price=0.0043, Supplier 1=Mouser, Type="Thick Film"
R5: library part RC1762, "RES SMD 453K OHM 1% 1/16W 0402", Device Package="0402 (1005 Metric)", Manufacturer=Yageo, Part Number=RC0402FR-07453KL, PowerRating="0.0625W, 1/16W", Supplier Part Number 1=603-RC0402FR-07453KL, TemperatureCoefficient=100ppm/C, TemperatureRange="-55C ~ 155C", Tolerance=1%, ComponentLink1Description=Datasheet, ComponentLink1URL=http://www.yageo.com/NewPortal/yageodocoutput?fileName=/pdf/R-Chip/PYu-RC_Group_51_RoHS_L_9.pdf, PartId=RC1762, Price=0.0043, Supplier 1=Mouser, Type="Thick Film"
R6: library part RC1847, "RES SMD 1.91M OHM 1% 1/16W 0402", Device Package="0402 (1005 Metric)", Manufacturer=Yageo, Part Number=RC0402FR-071M91L, PowerRating="0.0625W, 1/16W", Supplier Part Number 1=603-RC0402FR-071M91L, TemperatureCoefficient=100ppm/C, TemperatureRange="-55C ~ 155C", Tolerance=1%, ComponentLink1Description=Datasheet, ComponentLink1URL=http://www.yageo.com/NewPortal/yageodocoutput?fileName=/pdf/R-Chip/PYu-RC_Group_51_RoHS_L_9.pdf, PartId=RC1847, Price=0.0043, Supplier 1=Mouser, Type="Thick Film"
R7: library part RC1682, "RES SMD 120K OHM 1% 1/16W 0402", Device Package="0402 (1005 Metric)", Manufacturer=Yageo, Part Number=RC0402FR-07120KL, PowerRating="0.0625W, 1/16W", Supplier Part Number 1=603-RC0402FR-07120KL, TemperatureCoefficient=100ppm/C, TemperatureRange="-55C ~ 155C", Tolerance=1%, ComponentLink1Description=Datasheet, ComponentLink1URL=http://www.yageo.com/NewPortal/yageodocoutput?fileName=/pdf/R-Chip/PYu-RC_Group_51_RoHS_L_9.pdf, PartId=RC1682, Price=0.0043, Supplier 1=Mouser, Type="Thick Film"
R8: library part RC1647, "RES SMD 66.5K OHM 1% 1/16W 0402", Device Package="0402 (1005 Metric)", Manufacturer=Yageo, Part Number=RC0402FR-0766K5L, PowerRating="0.0625W, 1/16W", Supplier Part Number 1=603-RC0402FR-0766K5L, TemperatureCoefficient=100ppm/C, TemperatureRange="-55C ~ 155C", Tolerance=1%, ComponentLink1Description=Datasheet, ComponentLink1URL=http://www.yageo.com/NewPortal/yageodocoutput?fileName=/pdf/R-Chip/PYu-RC_Group_51_RoHS_L_9.pdf, PartId=RC1647, Price=0.0043, Supplier 1=Mouser, Type="Thick Film"
R9: library part RC1227, "RES SMD 68 OHM 1% 1/16W 0402", Device Package="0402 (1005 Metric)", Manufacturer=Yageo, Part Number=RC0402FR-0768RL, PowerRating="0.0625W, 1/16W", Supplier Part Number 1=603-RC0402FR-0768RL, TemperatureCoefficient=100ppm/C, TemperatureRange="-55C ~ 155C", Tolerance=1%, ComponentLink1Description=Datasheet, ComponentLink1URL=http://www.yageo.com/NewPortal/yageodocoutput?fileName=/pdf/R-Chip/PYu-RC_Group_51_RoHS_L_9.pdf, PartId=RC1227, Price=0.0043, Supplier 1=Mouser, Type="Thick Film"
R10: library part RC1949, "RES SMD 10M OHM 1% 1/16W 0402", Device Package="0402 (1005 Metric)", Manufacturer=Yageo, Part Number=RC0402FR-0710ML, PowerRating="0.0625W, 1/16W", Supplier Part Number 1=603-RC0402FR-0710ML, TemperatureCoefficient=100ppm/C, TemperatureRange="-55C ~ 155C", Tolerance=1%, ComponentLink1Description=Datasheet, ComponentLink1URL=http://www.yageo.com/NewPortal/yageodocoutput?fileName=/pdf/R-Chip/PYu-RC_Group_51_RoHS_L_9.pdf, PartId=RC1949, Price=0.0043, Supplier 1=Mouser, Type="Thick Film"
R11: library part RC1630, "RES SMD 51K OHM 1% 1/16W 0402", Device Package="0402 (1005 Metric)", Manufacturer=Yageo, Part Number=RC0402FR-0751KL, PowerRating="0.0625W, 1/16W", Supplier Part Number 1=603-RC0402FR-0751KL, TemperatureCoefficient=100ppm/C, TemperatureRange="-55C ~ 155C", Tolerance=1%, ComponentLink1Description=Datasheet, ComponentLink1URL=http://www.yageo.com/NewPortal/yageodocoutput?fileName=/pdf/R-Chip/PYu-RC_Group_51_RoHS_L_9.pdf, PartId=RC1630, Price=0.0043, Supplier 1=Mouser, Type="Thick Film"
R12 R22 R23: library part RC1531, "RES SMD 10K OHM 1% 1/16W 0402", Device Package="0402 (1005 Metric)", Manufacturer=Yageo, Part Number=RC0402FR-0710KL, PowerRating="0.0625W, 1/16W", Supplier Part Number 1=603-RC0402FR-0710KL, TemperatureCoefficient=100ppm/C, TemperatureRange="-55C ~ 155C", Tolerance=1%, ComponentLink1Description=Datasheet, ComponentLink1URL=http://www.yageo.com/NewPortal/yageodocoutput?fileName=/pdf/R-Chip/PYu-RC_Group_51_RoHS_L_9.pdf, PartId=RC1531, Price=0.0043, Supplier 1=Mouser, Type="Thick Film"
R13: library part PBT084, "TRIMMER 1K OHM 0.25W J LEAD TOP", Device Package="Rectangular - 0.189\" x 0.138\" Face x 0.209\" H (4.80mm x 3.50mm x 5.30mm)", Manufacturer=Bourns, Part Number=3224W-1-102E, PowerRating="0.25W, 1/4W", Resistive Material=Cermet, Supplier Part Number 1=652-3224W-1-102E, TemperatureCoefficient=100ppm/C, TemperatureRange="-65C ~ 150C", Tolerance=10%, Adjustment Type="Top Adjustment", ComponentLink1Description=Datasheet, ComponentLink1URL=https://www.bourns.com/docs/Product-Datasheets/3224.pdf, Mounting Type="Surface Mount", Number of Turns=12, PartId=PBT084, Price=3.278, Supplier 1=Mouser, Supplier 2=Digi-Key, Supplier Part Number 2=3224W-1-102ETR-ND
R14: library part RC1778, "RES SMD 576K OHM 1% 1/16W 0402", Device Package="0402 (1005 Metric)", Manufacturer=Yageo, Part Number=RC0402FR-07576KL, PowerRating="0.0625W, 1/16W", Supplier Part Number 1=603-RC0402FR-07576KL, TemperatureCoefficient=100ppm/C, TemperatureRange="-55C ~ 155C", Tolerance=1%, ComponentLink1Description=Datasheet, ComponentLink1URL=http://www.yageo.com/NewPortal/yageodocoutput?fileName=/pdf/R-Chip/PYu-RC_Group_51_RoHS_L_9.pdf, PartId=RC1778, Price=0.0043, Supplier 1=Mouser, Type="Thick Film"
R15: library part RC1496, "RES SMD 5.6K OHM 1% 1/16W 0402", Device Package="0402 (1005 Metric)", Manufacturer=Yageo, Part Number=RC0402FR-075K6L, PowerRating="0.0625W, 1/16W", Supplier Part Number 1=603-RC0402FR-075K6L, TemperatureCoefficient=100ppm/C, TemperatureRange="-55C ~ 155C", Tolerance=1%, ComponentLink1Description=Datasheet, ComponentLink1URL=http://www.yageo.com/NewPortal/yageodocoutput?fileName=/pdf/R-Chip/PYu-RC_Group_51_RoHS_L_9.pdf, PartId=RC1496, Price=0.0043, Supplier 1=Mouser, Type="Thick Film"
R16: library part RC1562, "RES SMD 17.8K OHM 1% 1/16W 0402", Device Package="0402 (1005 Metric)", Manufacturer=Yageo, Part Number=RC0402FR-0717K8L, PowerRating="0.0625W, 1/16W", Supplier Part Number 1=603-RC0402FR-0717K8L, TemperatureCoefficient=100ppm/C, TemperatureRange="-55C ~ 155C", Tolerance=1%, ComponentLink1Description=Datasheet, ComponentLink1URL=http://www.yageo.com/NewPortal/yageodocoutput?fileName=/pdf/R-Chip/PYu-RC_Group_51_RoHS_L_9.pdf, PartId=RC1562, Price=0.0043, Supplier 1=Mouser, Type="Thick Film"
R17 R18: library part RC1389, "RES SMD 1K OHM 1% 1/16W 0402", Device Package="0402 (1005 Metric)", Manufacturer=Yageo, Part Number=RC0402FR-071KL, PowerRating="0.0625W, 1/16W", Supplier Part Number 1=603-RC0402FR-071KL, TemperatureCoefficient=100ppm/C, TemperatureRange="-55C ~ 155C", Tolerance=1%, ComponentLink1Description=Datasheet, ComponentLink1URL=http://www.yageo.com/NewPortal/yageodocoutput?fileName=/pdf/R-Chip/PYu-RC_Group_51_RoHS_L_9.pdf, PartId=RC1389, Price=0.0043, Supplier 1=Mouser, Type="Thick Film"
R19: library part RC1206, "RES SMD 49.9 OHM 1% 1/16W 0402", Device Package="0402 (1005 Metric)", Manufacturer=Yageo, Part Number=RC0402FR-0749R9L, PowerRating="0.0625W, 1/16W", Supplier Part Number 1=603-RC0402FR-0749R9L, TemperatureCoefficient=100ppm/C, TemperatureRange="-55C ~ 155C", Tolerance=1%, ComponentLink1Description=Datasheet, ComponentLink1URL=http://www.yageo.com/NewPortal/yageodocoutput?fileName=/pdf/R-Chip/PYu-RC_Group_51_RoHS_L_9.pdf, PartId=RC1206, Price=0.0043, Supplier 1=Mouser, Type="Thick Film"
R20: library part RC1608, "RES SMD 36.5K OHM 1% 1/16W 0402", Device Package="0402 (1005 Metric)", Manufacturer=Yageo, Part Number=RC0402FR-0736K5L, PowerRating="0.0625W, 1/16W", Supplier Part Number 1=603-RC0402FR-0736K5L, TemperatureCoefficient=100ppm/C, TemperatureRange="-55C ~ 155C", Tolerance=1%, ComponentLink1Description=Datasheet, ComponentLink1URL=http://www.yageo.com/NewPortal/yageodocoutput?fileName=/pdf/R-Chip/PYu-RC_Group_51_RoHS_L_9.pdf, PartId=RC1608, Price=0.0043, Supplier 1=Mouser, Type="Thick Film"
R21: library part RC1623, "RES SMD 46.4K OHM 1% 1/16W 0402", Device Package="0402 (1005 Metric)", Manufacturer=Yageo, Part Number=RC0402FR-0746K4L, PowerRating="0.0625W, 1/16W", Supplier Part Number 1=603-RC0402FR-0746K4L, TemperatureCoefficient=100ppm/C, TemperatureRange="-55C ~ 155C", Tolerance=1%, ComponentLink1Description=Datasheet, ComponentLink1URL=http://www.yageo.com/NewPortal/yageodocoutput?fileName=/pdf/R-Chip/PYu-RC_Group_51_RoHS_L_9.pdf, PartId=RC1623, Price=0.0043, Supplier 1=Mouser, Type="Thick Film"
R24: library part RC2513, "RES SMD 10K OHM 5% 1/10W 0603", Device Package="0603 (1608 Metric)", Manufacturer=Yageo, Part Number=RC0603JR-0710KL, PowerRating="0.1W, 1/10W", Supplier Part Number 1=603-RC0603JR-0710KL, TemperatureCoefficient=100ppm/C, TemperatureRange="-55C ~ 155C", Tolerance=5%, ComponentLink1Description=Datasheet, ComponentLink1URL=http://www.yageo.com/NewPortal/yageodocoutput?fileName=/pdf/R-Chip/PYu-RC_Group_51_RoHS_L_9.pdf, PartId=RC2513, Price=0.0043, Supplier 1=Mouser, Type="Thick Film"
U1: library part UO0077, "IC AMP WIDE BANDWIDTH 16VQFN", Device Package=16-VQFN, Manufacturer=TI, Operating Temperature="-40C ~ 125C", Supplier Part Number 1=296-BUF802IRGTRCT-ND, ComponentLink1Description=Datasheet, ComponentLink1URL=https://www.ti.com/lit/ds/symlink/buf802.pdf, Part Number=BUF802IRGTR, PartId=UO0077, Price=6, Supplier 1=Digi-Key, Supplier 2=Mouser, Supplier Part Number 2=595-BUF802IRGTR, Type=OPAMP
U2: library part UO0076, "IC OPAMP JFET 1CIRC 8SOIC", Device Package=8-SOIC, Manufacturer=TI, Operating Temperature="-40C ~ 125C", Supplier Part Number 1=296-43606-2-ND, ComponentLink1Description=Datasheet, ComponentLink1URL=https://www.ti.com/lit/ds/symlink/opa4140.pdf, Part Number=OPA140AIDR, PartId=UO0076, Price=4, Supplier 1=Digi-Key, Supplier 2=Mouser, Supplier Part Number 2=595-OPA140AIDR, Type=OPAMP
U3: library part URL095, "IC REG LIN POS/NEG ADJ 10WSON", Device Package=10-WFDFN, Input Voltage MAX=30V, Manufacturer=TI, Operating Temperature="-40C ~ 125C", Output Current=150mA, Output Voltage=Adjustable, Supplier Part Number 1=296-47504-1-ND, ComponentLink1Description=Datasheet, ComponentLink1URL=https://www.ti.com/lit/gpn/tps7a39, Part Number=TPS7A3901DCST, PartId=URL095, Price=1.5, Supplier 1=Digi-Key, Supplier 2=Mouser, Supplier Part Number 2=595-TPS7A3901DCST, Type=LDO
U4: library part URS042, "IC REG BOOST INV DUAL 16WQFN", Device Package=16-WQFN, Manufacturer=TI, Operating Temperature="-40C ~ 85C", Supplier Part Number 1=595-TPS65135RTER, ComponentLink1Description=Datasheet, ComponentLink1URL=https://www.ti.com/lit/ds/symlink/tps65135.pdf, Part Number=TPS65135RTER, PartId=URS042, Price=0.8, Supplier 1=Mouser, Supplier 2=Digi-Key, Supplier Part Number 2=296-29899-2-ND, Type=Boost-Invert

## Via types
v1: diameter 0.45, hole 0.3, Top to Bottom Layer, tented both sides, 311 vias
v2: diameter 0.45, hole 0.3, Top to Bottom Layer, 10 vias
v3: diameter 0.6, hole 0.3, Top to Bottom Layer, 5 vias

## Nets (pads, with @x,y where several pads share a name; then routed paths per layer and width w, separated by ;. In a path a pad name is that pad's centre, name@x,y a point inside that pad or via, vN(x,y) a via of type N, cw(c..) or ccw(c..) an arc to the next point about the centre after c; other vN are vias at no path point)
GND: C3.2 C7.1 C9.2 C10.2 C11.1 C12.2 C13.1 C14.2 C15.1 C16.2 C17.1 C18.2 C19.1 C20.2 C21.1 C22.2 C23.2 C24.2 C25.2 C26.1 C27.2 C28.1 C29.2 C30.1 C31.2 C32.1 D2.2 J2.1 J3.2 J4.5 J4.S J5.1 R4.2 R8.2 R13.2 R13.3 R22.2 U1.17 U3.4 U3.11 U4.5 U4.11 U4.12 U4.17 | length 27.2
  Top w0.2: v1(7.3,17.8) v1(7.3,18.5) v1(7.3,19.2) ; R4.2 7.95,17.836 J5.1@8.59,18.476 ; v1(8.1,17.8) v1(8.1,18.5) v1(8.1,19.2) ; J5.1 v1(6.5,18.5) ; v2(14.498,14.006) U1.17@14.997,13.507 ; v2(14.502,13.013) 14.995,13.506 v2(15.495,13.006) ; v2(15,13.5) v2(15.5,14) ; v1(15.2,0.8) v1(15.2,1.5) v1(15.2,2.2) ; v1(16,0.8) v1(16,1.5) v1(16,2.2) ; J2.1@16.44,1.5 v1(14.4,1.5) ; U3.4 36.975,7.2 37.125,7.35 U3.11@37.125,7.652 ; v2(54.4,9.1) v2(54.9,8.6) v2(55.4,9.1) 55.648,9.348 55.648,9.506 55.65,9.509 U4.5 55.65,11.25 C22.2@55.4,11.5 ; v2(54.406,8.102) U4.17@54.905,8.601 ; U4.17@54.904,8.602 U4.17@54.905,8.601 ; U4.17@54.906,8.602 U4.17@54.905,8.601 ; v2(55.404,8.102) U4.17@54.905,8.601 ; v1(6.5,18.5) v1(6.5,19.2) v1(6.5,18.5) ; v1(6.5,18.5) v1(6.5,17.8) v1(6.5,18.5) ; v1(14.4,1.5) v1(14.4,2.2) v1(14.4,1.5) ; v1(14.4,1.5) v1(14.4,0.8) v1(14.4,1.5)
  other v1: 19.3,0.7 20.3,0.7 21.3,0.7 22.3,0.7 23.3,0.7 24.3,0.7 25.3,0.7 26.3,0.7 27.3,0.7 28.3,0.7 29.3,0.7 30.3,0.7 31.3,0.7 32.3,0.7 33.3,0.7 34.3,0.7 35.3,0.7 36.3,0.7 37.3,0.7 38.3,0.7 39.3,0.7 40.3,0.7 41.3,0.7 42.3,0.7 43.3,0.7 44.3,0.7 45.3,0.7 46.3,0.7 47.3,0.7 48.3,0.7 49.3,0.7 50.3,0.7 51.3,0.7 52.3,0.7 53.3,0.7 54.3,0.7 55.3,0.7 56.3,0.7 57.3,0.7 58.3,0.7 59.3,0.7 60.3,0.7 61.3,0.7 62.3,0.7 63.3,0.7 64.3,0.7 14.4,0.8 14.4,1.5 22.3,1.8 14.4,2.2 23.2,2.8 14.4,3 15.4,3 16.4,3 17.4,3 18.4,3 13.6,3.7 12.9,4.4 12.2,5.1 58.2,5.3 27.7,5.5 43.9,5.7 45.2,5.7 11.5,5.8 57.4,5.9 28.7,6.4 10.8,6.5 10.1,7.2 52.5,7.5 37.1,7.7 38.3,7.7 9.4,7.9 11.5,8 52.5,8.2 69.4,8.6 8.7,8.7 10.5,9 11.5,9 18.4,9 8,9.3 43.9,9.6 45.2,9.6 69.4,9.6 9.5,10 10.5,10 11.5,10 18.4,10 69.4,10.6 29,10.9 57.8,10.9 58.7,10.9 8.5,11 9.5,11 10.5,11 11.5,11 18.4,11 63.4,11.5 64.4,11.5 65.4,11.5 66.4,11.5 67.4,11.5 68.4,11.5 69.4,11.5 23.5,11.6 21.322,13.592 69.4,13.9 22.442,14.514 65.6,14.6 66.6,14.6 67.7,14.6 23.883,14.674 25.333,14.674 26.783,14.674 28.233,14.674 29.683,14.674 31.133,14.674 32.583,14.674 34.033,14.674 35.483,14.674 36.933,14.674 38.383,14.674 39.833,14.674 41.283,14.674 42.733,14.674 44.183,14.674 45.633,14.674 47.083,14.674 48.533,14.674 49.983,14.674 51.433,14.674 52.883,14.674 54.333,14.674 55.783,14.674 57.233,14.674 58.683,14.674 60.133,14.674 61.583,14.674 63.033,14.674 64.483,14.674 19.236,14.826 20.636,15.203 11.5,16 18.5,16 21.816,16.046 23.239,16.326 24.689,16.326 26.139,16.326 27.589,16.326 29.039,16.326 30.489,16.326 31.939,16.326 33.389,16.326 34.839,16.326 36.289,16.326 37.739,16.326 39.189,16.326 40.639,16.326 42.089,16.326 43.539,16.326 44.989,16.326 46.439,16.326 47.889,16.326 49.339,16.326 50.789,16.326 52.239,16.326 53.689,16.326 55.139,16.326 56.589,16.326 58.039,16.326 59.489,16.326 60.939,16.326 62.389,16.326 63.839,16.326 65.6,16.4 66.6,16.4 67.7,16.4 11.5,17 18.5,17 69.4,17.1 6.5,17.8 11.5,18 18.5,18 6.5,18.5 11.5,19 6.5,19.2 18.1,19.3 19.1,19.3 20.1,19.3 21.1,19.3 22.1,19.3 23.1,19.3 24.1,19.3 25.1,19.3 26.1,19.3 27.1,19.3 28.1,19.3 29.1,19.3 30.1,19.3 31.1,19.3 32.1,19.3 33.1,19.3 34.1,19.3 35.1,19.3 36.1,19.3 37.1,19.3 38.1,19.3 39.1,19.3 40.1,19.3 41.1,19.3 42.1,19.3 43.1,19.3 44.1,19.3 45.1,19.3 46.1,19.3 47.1,19.3 48.1,19.3 49.1,19.3 50.1,19.3 51.1,19.3 52.1,19.3 53.1,19.3 54.1,19.3 55.1,19.3 56.1,19.3 57.1,19.3 58.1,19.3 59,19.3 60.4,19.5 61.4,19.5 62.4,19.5 63.4,19.5 64.4,19.5 65.4,19.5 66.4,19.5 67.4,19.5 68.4,19.5 69.4,19.5
  other v3: 37.2,6.8 38.2,6.8 37.7,7.7 37.2,8.6 38.2,8.6
NetC1_1: C1.1 C5.2 R3.2 R4.1 | length 3.5
  Top w0.2: R3.2 8.932,15.083 R3.2@8.932,15.05 ; R4.1 8.95,15.068 R3.2@8.932,15.05 ; C1.1@10.1,13.983 9,13.983 9,14.983 R3.2@8.932,15.05
NetC1_2: C1.2 R2.1 | length 1.1
  Top w0.2: C1.2@10.1,13.018 R2.1@11.2,13.018
NetC2_1: C2.1 R11.1 R12.1 U2.2 | length 8.1
  Top w0.2: R11.1 18.703,12.803 19.697,12.803 R12.1 C2.1 19.667,11.567 19.667,9.965 19.55,9.847 19.067,9.364 19.067,7.368 19.225,7.21 U2.2@19.55,7.21 ; U2.2@19.55,7.025 U2.2@19.55,7.21 ; U2.2 19.575,7.235 U2.2@19.55,7.21
NetC2_2: C2.2 R15.2 U2.6 | length 8.4
  Top w0.203: C2.2 R15.2 20.667,10.367 20.667,9.833 24.56,5.94 25.6,5.94 U2.6
NetC3_1: C3.1 R15.1 U1.4 | length 11.8
  Top w0.2: C3.1 21.7,11.5 R15.1 v1(22.2,10.4)
  Top w0.203: v1@13.533,12.033 U1.4@13.533,12.75
  IN2 w0.2: 18.296,11.9 20.7,11.9 v1(22.2,10.4)
  IN2 w0.203: v1(13.5,12) 13.6,11.9 18.296,11.9
NetC4_1: C4.1 R1.2 R3.1 R6.1 | length 3.3
  Top w0.2: R1.2@5.7,13.983 6.8,13.983 7.9,13.983 7.9,14.983 R3.1@7.967,15.05
NetC4_2: C4.2 C5.1 | length 1.1
  Top w0.2: C4.2@7.9,13.018 C5.1@9,13.018
NetC6_1: C6.1 R20.2 R22.1 U3.9 | length 0.3
  Top w0.2: 42.182,8.15 42.182,8.183 R22.1
NetC8_1: C8.1 R21.1 R23.1 U3.7
NetC9_1: C9.1 U3.3 | length 1.1
  Top w0.2: C9.1 U3.3 U3.3@36.3,7.7
NetC22_1: C22.1 U4.4 | length 2.2
  Top w0.2: U4.4 56.325,10.625 56.5,10.8 C22.1
NetD2_1: D2.1 R24.2 | length 2
  Top w0.2: D2.1 22.975,17.725 24.875,17.725 R24.2
NetF1_1: F1.1 J4.1
NetF1_2: F1.2 FB1.1
NetL1_1: L1.1 U4.15 U4.16
NetL1_2: L1.2 U4.13 U4.14
NetR2_2: R2.2 R10.1 U1.2 | length 2.4
  Top w0.2: R2.2@11.2,13.983 12.3,13.983 12.533,13.75 U1.2@13.527,13.75
NetR5_1: R5.1 R7.2 U4.7 | length 3.4
  Top w0.2: R7.2@53.2,12.8 54.3,11.7 R5.1 54.3,11.2 54.65,10.85 U4.7
NetR6_2: R6.2 R8.1 R9.1 | length 15.8
  Top w0.2: R6.2@6.8,13.018 6.8,11.525 12.425,5.9 R9.1 R8.1
NetR7_1: R7.1 R14.2 U4.6 | length 4.1
  Top w0.2: R7.1 54.9,12.8 ; U4.6 55.15,10.95 54.9,11.2 54.9,12.8 ; R14.2 54.9,12.8
NetR9_2: R9.2 U2.3 | length 1.6
  Top w0.2: R9.2 18.633,5.933 20.143,5.933 U2.3
NetR10_2: R10.2 U1.3 | length 1.3
  Top w0.2: R10.2@12.3,13.018 12.532,13.25 U1.3@13.527,13.25
NetR11_2: R11.2 R19.1 U1.11 | length 2.6
  Top w0.2: U1.11 16.878,13.75 ccw(c16.878,14.209) 17.119,13.818 ccw(c16.878,14.209) 17.203,13.885 cw(c17.583,13.317) 17.583,14 R19.1 ; R11.2 R19.1 ; R19.1@17.8,14 R19.1
NetR12_2: R12.2 R13.1 | length 6
  Top w0.2: R12.2 20.75,12.85 23.748,12.85 25.2,11.398 25.2,10.6 R13.1
NetR16_1: R16.1 U1.7 | length 1.3
  Top w0.2: U1.7@15.25,12.027 15.25,10.85 R16.1 R16.1@15.275,10.825
NetR17_1: R17.1 U1.15 U1.16
NetR18_1: R18.1 U1.13 U1.14
NetR23_2: R23.2 U3.8 | length 3.4
  Top w0.2: U3.8 42,7.7 R23.2
OUT: J3.1 R19.2 | length 51.3
  Top w0.37: R19.2 20.034,14 ccw(c20.034,15.366) 21,14.4 21.356,14.756 cw(c23.152,12.96) 23.152,15.5 69.1,15.5 69.2,15.5 69.3,15.5 69.4,15.5 J3.1
TIP: J1.1 R1.1 | length 11
  Top w0.2: v1(1.3,12.8) v1(1.3,13.5) v1(1.3,14.2) ; v1(2.1,12.8) v1(2.1,13.5) v1(2.1,14.2) ; R1.1@5.7,13.018 3.023,13.018 J1.1 v1(0.5,13.5) ; v1(0.5,13.5) v1(0.5,14.2) v1(0.5,13.5) ; v1(0.5,13.5) v1(0.5,12.8) v1(0.5,13.5)
  other v1: 0.5,12.8 0.5,13.5 0.5,14.2
V+: C23.1 C24.1 C27.1 R5.2 U3.1 U3.2 U4.9 U4.10 | length 2.3
  Top w0.2: R5.2@53.2,11.5 53.475,11.225 U4.9
  other v1: 49.9,9 50.6,9 49.9,9.7 50.6,9.7 35,11.6 35.7,11.6 35,12.3 35.7,12.3
V-: C25.1 C26.2 C28.2 R14.1 U3.5 U4.2 U4.3 | length 3.9
  Top w0.2: R14.1 57.2,12.1 57.2,9.2 57.242,9.158
  other v1: 35,3.1 35.7,3.1 35,3.8 35.7,3.8 59.2,8.5 59.9,8.5 59.2,9.2 59.9,9.2
VBUS: C7.2 FB1.2 U4.1 U4.8 | length 5.4
  Top w0.2: v1(54,10.7) 54.15,10.55 U4.8
  IN2 w0.2: v1(54,10.7) 54.7,10.7 56.1,9.3 56.1,8.7 v1(57.1,7.7)
VCC: C6.2 C10.1 C12.1 C14.1 C16.1 C18.1 C20.1 C29.1 C31.1 R17.2 R20.1 R24.1 U1.1 U1.12 U2.7 U2.8 U3.10 | length 0.9
  Top w0.203: R24.1 26.325,17.725 26.35,17.7 v1(27.2,17.7)
  other v1: 28.7,8.2 27.7,9.2 40,10.1 40.7,10.1 41.5,10.1 42.3,10.1 13.5,19 14.3,19 15,19 15.8,19 16.5,19
VEE: C8.2 C11.2 C13.2 C15.2 C17.2 C19.2 C21.2 C30.2 C32.2 R16.2 R18.2 R21.2 U1.5 U1.6 U1.8 U1.9 U1.10 U2.4 U3.6 | length 14.7
  Top w0.203: v1(15.1,17.2) R18.2
  IN2 w0.203: v1(15.1,17.2) 13.8,15.9 13.8,12.9 14.3,12.4 21.725,12.4 22.6,11.525
  other v1: 20.5,1.8 19.5,2.8 40,5.1 40.7,5.1 41.5,5.1 42.3,5.1 13.5,8.1 14.3,8.1 15,8.1 15.8,8.1 16.5,8.1
pads on no net: J4.2 J4.3 J4.4 U2.1 U2.5

## Polygon pours and split planes (outlines as drawn)
GND on Top "GND_L01_P110" (solid, pour order 110): 7.35,0 70,0 70,20 11.05,20 6.05,20 6.05,17.35 11.15,17.35 11.15,15.5 12.9,15.5 12.9,11.7 7.35,11.7
VEE on Top "VEE_L01_P035" (solid, pour order 35): 13,13.375 17,13.375 17,7.6 13,7.6
VCC on Top "VCC_L01_P034" (solid, pour order 34): 13,14.125 13,20 17,20 17,14.125
NetC6_1 on Top "NETC6_1_L01_P096" (solid, pour order 96): 38.8,8.675 42.75,8.675 42.75,8.05 38.8,8.05
NetC8_1 on Top "NETC8_1_L01_P094" (solid, pour order 94): 38.801,7.324 38.801,6.099 42.751,6.099 42.751,7.324
NetR17_1 on Top "NETR17_1_L01_P031" (solid, pour order 31): 14.1,14.6 14.85,14.6 14.85,16.55 14.1,16.55
VCC on Top "VCC_L01_P048" (solid, pour order 48): 26.4,6.9 26.4,7.675 27.175,7.675 28.95,7.675 28.95,9.4 24.85,9.4 24.85,6.9
VEE on Top "VEE_L01_P046" (solid, pour order 46): 19.25,4.975 21,4.975 21,1.5 19.25,1.5
NetR18_1 on Top "NETR18_1_L01_P030" (solid, pour order 30): 15.15,14.6 15.15,16.55 15.9,16.55 15.9,14.6
V- on IN2 "Signal/Power-V-" (solid, pour order 70): 34.7,0 54.2,0 60.3,6.1 60.3,9.4 60.1,9.6 58.3,9.6 52.8,4.1 34.7,4.1
V+ on IN2 "Signal/Power-V+" (solid, pour order 62): 46.9,11.3 49.7,8.5 51,8.5 51.1,8.6 51.1,10.8 47.7,14.2 34.7,14.2 34.7,11.3
VEE on IN2 "VEE_L03_P118" (solid, pour order 118): 47.4,0 47.4,20 12.95,20 12.95,0
VCC on IN2 "VCC_L03_P116" (solid, pour order 116): 13.05,14.625 14.162,14.625 14.162,12.369 26.05,12.369 26.05,7.652 47.4,7.652 47.4,20 13.05,20
GND on Bottom Layer "GND_L04_P114" (solid, pour order 114): 13.05,14.625 14.162,14.625 14.162,11.7 7.35,11.7 7.35,0 11.033,0 74.45,0 74.45,20 11.125,20 6.05,20 6.05,17.35 11.15,17.35 11.15,15.501 13.05,15.501
GND on IN1 (GND) "GND_L02_P112" (solid, pour order 112): 6.05,17.35 11.15,17.35 11.15,15.5 13.05,15.5 13.05,14.625 14.16,14.625 14.16,11.7 7.35,11.7 7.35,0 74.45,0 74.45,20 11.2,20 6.05,20

## Other copper
Top:
  region net NetF1_1: 66.4,3.5 66.4,2.8 66.1,2.5 62.6,2.5 62.5,2.6 62.5,4.2 62.6,4.3 63.9,4.3 64.7,3.5
  pour cut-out: 54,9.5 54,8.7 54.6,8.7 54.6,7.7 55.8,7.7 55.8,9.5
  pour cut-out: 13.9,14.6 13.9,12.4 16.1,12.4 16.1,14.6
  pour cut-out: 69.9,16.8 68.9,16.8 68.3,16.1 68.3,14.9 68.9,14.2 69.9,14.2
  region net OUT: 69.05,15.805 68.525,15.675 68.525,15.325 69.05,15.195 69.1,15.195 69.1,15.805
  region net VBUS: 56,8 56,7.7 56.6,7.7 57.4,6.9 59.3,6.9 59.5,6.7 60.6,6.7 60.8,6.9 60.8,7.9 60.7,8
  region net NetF1_2: 59.6,6.5 59.4,6.3 59.4,5.7 59.4,2.7 59.6,2.5 60.6,2.5 60.8,2.7 60.8,5.3 60.8,6.3 60.6,6.5
  region net V-: 56,8.2 60.1,8.2 60.2,8.3 60.2,9.4 60.1,9.5 57.3,9.5 56.8,9 56,9
  region net VCC: 42.449,9.849 41.951,9.849 41.951,9.151 41.825,9.025 39.625,9.025 39.5,8.9 39.5,8.575 38.8,8.575 38.8,9.6 38.9,9.7 39.5,9.7 39.6,9.8 39.6,13.2 39.7,13.3 42.5,13.3 42.6,13.2 42.6,10
  region net VEE: 39.6,6.3 41.9,6.3 41.951,6.249 41.951,5.949 42.1,5.8 42.5,5.8 42.6,5.7 42.6,2.2 42.5,2.1 39.7,2.1 39.6,2.2 39.6,5.5 39.5,5.6 38.9,5.6 38.8,5.7 38.8,6.825 39.5,6.825 39.5,6.4
  region net V+: 53.8,8.7 49.7,8.7 49.6,8.8 49.6,9.9 49.7,10 52.5,10 53,9.5 53.8,9.5
  region net NetL1_1: 56,4.1 55.9,4 55.2,4 55.2,6.5 55,6.7 55,7.6 55.7,7.6 55.8,7.5 55.8,5.9 56,5.7
  region net NetL1_2: 53.802,4.093 53.902,3.993 54.602,3.993 54.602,6.493 54.802,6.693 54.802,7.593 54.102,7.593 54.002,7.493 54.002,5.893 53.802,5.693
  region net V+: 35.9,8.075 36.6,8.075 36.6,9.2 37.1,9.7 37.1,12.5 37,12.6 34.7,12.6 34.6,12.5 34.6,11.3 34.7,11.2 35.8,11.2 35.9,11.1
  region net V-: 35.9,6.825 36.6,6.825 36.6,6.4 37.1,5.9 37.1,2.9 37,2.8 34.7,2.8 34.6,2.9 34.6,4.1 34.7,4.2 35.8,4.2 35.9,4.3
IN2:
  pour cut-out: 35.491,14.2 35.491,20 48.275,20 48.275,14.2
IN1 (GND):
  region net GND: 70,16.7 70,14.3 69.6,14.3 69.6,16.7

## Silkscreen, mask and mechanical layers (free items; w line width, h text height)
Board Layer Stack Bottom Overlay:
  text "SIGNAL INPUT / MAXIMUM +/- 10 V" at 27.875,15.6 h1.02
  text "BUF802 ACTIVE PROBE / JAMES WILSON 2024 / HIFIPHILE 2024" at 63.7,14.05 h1.02
Top Solder:
  rectangle: 64.2,14.3 70.1,16.7
  rectangle: 68.093,14.875 68.575,15.725